# Altium PCB QFN-28_L5.0-W5.0-P0.50-BL-EP_2021-08-31.pcbdoc
Units mm, origin at the board's own origin, x right, y up, seen from the top; angles counter-clockwise.
Board outline 34.86 x 31.9 mm, 2 copper layers (Top Layer, Bottom Layer); 1 components, 0 nets, 29 pads, 0 vias.
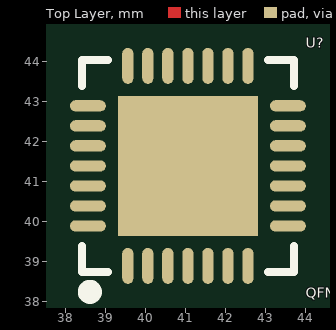
[diagram p0: Top Layer view]
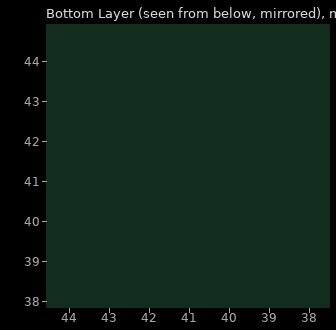
[diagram p1: Bottom Layer view, seen from below]

## Layer stack, top to bottom
Top Layer: signal copper (thickness not stored)
Dielectric: dielectric 0.32, FR-4, Dk 4.8
Bottom Layer: signal copper (thickness not stored)

## Board outline
60.256,25.4 25.4,25.4 25.4,57.304 60.256,57.304

## Components (designator, comment, footprint, x,y, rotation, side; value= is the part's Value field where it differs from the comment)
U? "QFN-28_L5.0-W5.0-P0.50-BL-EP" QFN-28_L5.0-W5.0-P0.50-BL-EP 41.05,41.225 r0 top

## Footprints (in the part's own frame and the unit in brackets; to place one, negate y for a bottom-side part, rotate by r counter-clockwise, add the part's x,y. Pads: shape width x height; smd on the part's side, far side on the other; paste and mask are expansions set on the pad)
QFN-28_L5.0-W5.0-P0.50-BL-EP [mm]
  oval 0.28x0.9 smd: 1(-1.501,-2.325) 2(-1.001,-2.325) 3(-0.501,-2.325) 4(0,-2.325) 5(0.5,-2.325) 6(1.001,-2.325) 7(1.501,-2.325) 15(1.501,2.675) 16(1.001,2.675) 17(0.5,2.675) 18(0,2.675) 19(-0.501,2.675) 20(-1.001,2.675) 21(-1.501,2.675)
  oval 0.9x0.28 smd: 8(2.5,-1.326) 9(2.5,-0.826) 10(2.5,-0.326) 11(2.5,0.175) 12(2.5,0.675) 13(2.5,1.176) 14(2.5,1.676) 22(-2.5,1.676) 23(-2.5,1.176) 24(-2.5,0.675) 25(-2.5,0.175) 26(-2.5,-0.326) 27(-2.5,-0.826) 28(-2.5,-1.326)
  rect 3.5x3.5 smd: 29(0,0.175)
  silkscreen extent -2.65,-3.12 2.65,2.82

## Nets (pads, with @x,y where several pads share a name; then routed paths per layer and width w, separated by ;. In a path a pad name is that pad's centre, name@x,y a point inside that pad or via, vN(x,y) a via of type N, cw(c..) or ccw(c..) an arc to the next point about the centre after c; other vN are vias at no path point)
pads on no net: U?.1 U?.2 U?.3 U?.4 U?.5 U?.6 U?.7 U?.8 U?.9 U?.10 U?.11 U?.12 U?.13 U?.14 U?.15 U?.16 U?.17 U?.18 U?.19 U?.20 U?.21 U?.22 U?.23 U?.24 U?.25 U?.26 U?.27 U?.28 U?.29